# EAGLE board controller_without_autorouter (EAGLE 7.1.0)
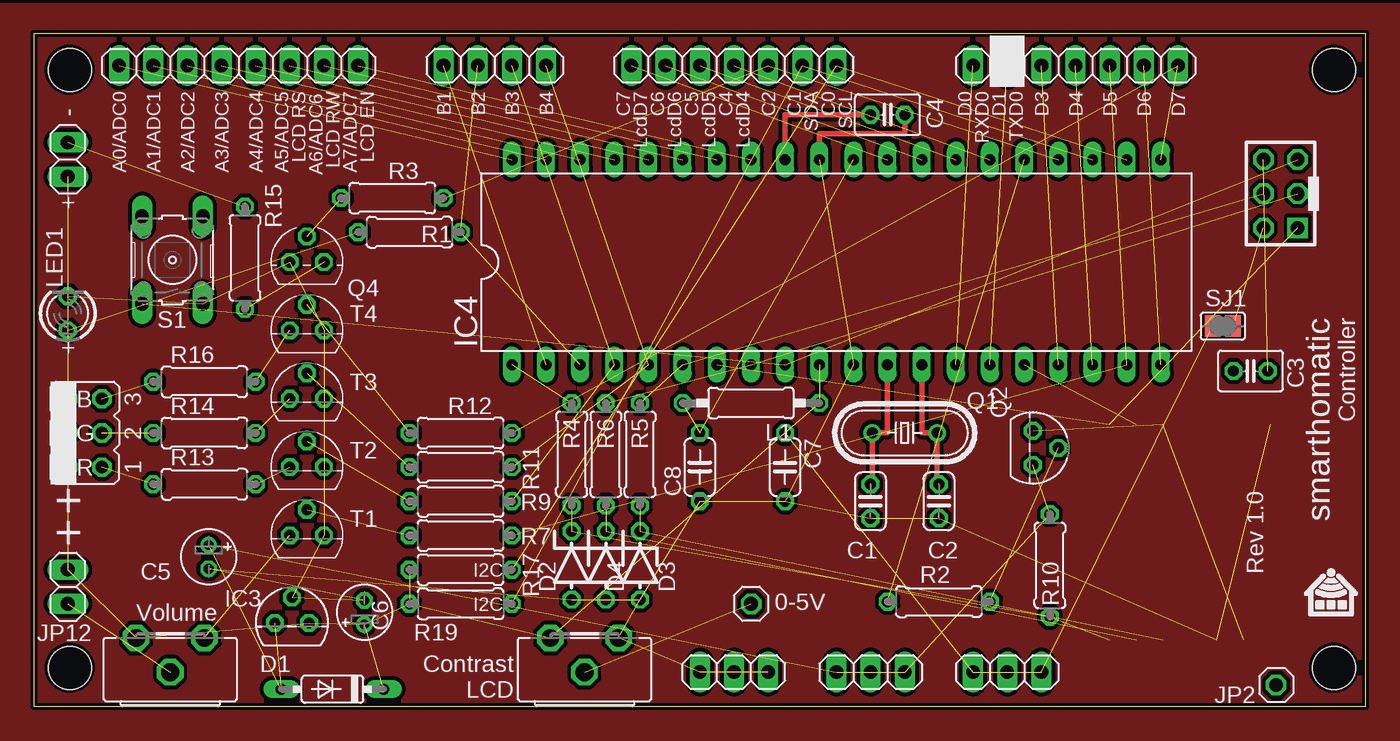
[diagram p0: board, top side]
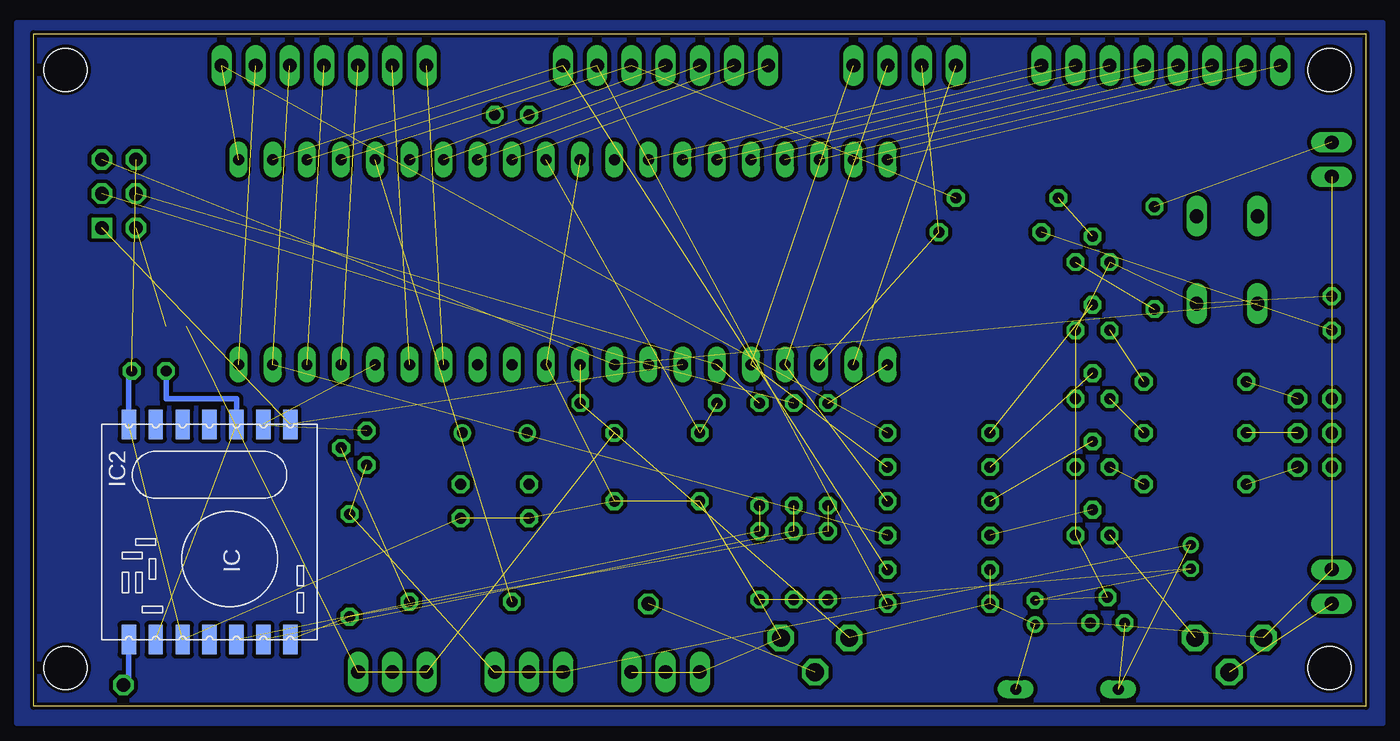
[diagram p1: board, bottom side, seen from below]

Size 99.06 x 50 mm. Coordinates in mm from the lower left corner, seen from the top.
Outline: 0,0 99.06,0 99.06,50 0,50 0,0
Copper layers (1*16): Top 0.035mm / dielectric 1.5mm / Bottom 0.035mm
Design rules "SeeedStudio_2layer_DRU_no_angle_20140221": minimum track width 6mil, minimum drill 12mil, track to track 6mil, track to pad 6mil, pad to pad 6mil, via to via 6mil, smd to smd 0mil, copper to edge 10mil, drill to drill 10mil, minimum pad ring 10mil, minimum via ring 6mil, stop-mask expansion 2mil, vias tented up to drill 100mil, thermal gap 10mil
Net classes: 0 default: clearance 0.305 mm
Holes 3.2 mm at 2.7,47.31 96.68,47.31 96.68,2.86 2.7,2.86

## Footprints (pad centres in the part's own frame; a part is rotated, then mirrored left to right if it is on the bottom)
C025-024X044 = drill 0.813 octagon: 1 -1.27,0; 2 1.27,0
C025-030X050 = drill 0.813 octagon: 1 -1.27,0; 2 1.27,0
E1,8-4 = drill 0.711 pad 1.168: + -0.889,0 | drill 0.711 pad 1.168 octagon: - 0.889,0
C050-024X044 = drill 0.813 octagon: 1 -2.54,0; 2 2.54,0
DO35-7 = drill 0.813 long: A 3.81,0; C -3.81,0
ZDIO-5 = drill 0.813 octagon: A 2.54,0; C -2.54,0
RFM = smd 2.184 x 1.067: 1 0,14; 2 0,12; 3 0,10; 4 0,8; 5 0,6; 6 0,4; 7 0,2; 8 16,2; 9 16,4; 10 16,6; 11 16,8; 12 16,10; 13 16,12; 14 16,14
TO92 = drill 0.813 octagon: 1 -1.27,0; 2 0,1.905; 3 1.27,0
DIL40 = drill 0.813 long: 1 -24.13,-7.62; 2 -21.59,-7.62; 3 -19.05,-7.62; 4 -16.51,-7.62; 5 -13.97,-7.62; 6 -11.43,-7.62; 7 -8.89,-7.62; 8 -6.35,-7.62; 9 -3.81,-7.62; 10 -1.27,-7.62; 11 1.27,-7.62; 12 3.81,-7.62; 13 6.35,-7.62; 14 8.89,-7.62; 15 11.43,-7.62; 16 13.97,-7.62; 17 16.51,-7.62; 18 19.05,-7.62; 19 21.59,-7.62; 20 24.13,-7.62; 21 24.13,7.62; 22 21.59,7.62; 23 19.05,7.62; 24 16.51,7.62; 25 13.97,7.62; 26 11.43,7.62; 27 8.89,7.62; 28 6.35,7.62; 29 3.81,7.62; 30 1.27,7.62; 31 -1.27,7.62; 32 -3.81,7.62; 33 -6.35,7.62; 34 -8.89,7.62; 35 -11.43,7.62; 36 -13.97,7.62; 37 -16.51,7.62; 38 -19.05,7.62; 39 -21.59,7.62; 40 -24.13,7.62
AVR-ISP-6 = drill 1.016 square: 1 -2.54,-1.27 | drill 1.016 octagon: 2 -2.54,1.27; 3 0,-1.27; 4 0,1.27; 5 2.54,-1.27; 6 2.54,1.27
1X01 = drill 1.016 octagon: 1 0,0
1X03 = drill 1.016 long: 1 -2.54,0; 2 0,0; 3 2.54,0
1X08 = drill 1.016 long: 1 -8.89,0; 2 -6.35,0; 3 -3.81,0; 4 -1.27,0; 5 1.27,0; 6 3.81,0; 7 6.35,0; 8 8.89,0
1X04 = drill 1.016 long: 1 -3.81,0; 2 -1.27,0; 3 1.27,0; 4 3.81,0
1X07 = drill 1.016 long: 1 -7.62,0; 2 -5.08,0; 3 -2.54,0; 4 0,0; 5 2.54,0; 6 5.08,0; 7 7.62,0
1X02 = drill 1.016 long: 1 -1.27,0; 2 1.27,0
JP3Q = drill 0.914 octagon: 1 -2.54,-1.27; 2 -2.54,1.27; 3 0,-1.27; 4 0,1.27; 5 2.54,-1.27; 6 2.54,1.27
0207/10 = drill 0.813 octagon: 1 -5.08,0; 2 5.08,0
LED3MM = drill 0.813 octagon: A -1.27,0; K 1.27,0
HC49/S = drill 0.813: 1 -2.413,0; 2 2.413,0
TO92' = drill 0.813 octagon: 1 1.27,0; 2 0,1.905; 3 -1.27,0
TO-92 = drill 0.813 octagon: 1 -1.27,0; 2 0,1.905; 3 1.27,0
0207/7 = drill 0.813 octagon: 1 -3.81,0; 2 3.81,0
CA9H = drill 1.321 octagon: A -2.54,0; E 2.54,0; S 0,2.54
B3F-10XX = drill 1.016 long: 1 -3.251,2.261; 2 3.251,2.261; 3 -3.251,-2.261; 4 3.251,-2.261
SJ = smd 1.168 x 1.6: 1 -0.762,0; 2 0.762,0

## Placement (x,y rotation side)
C1  22p  [C025-024X044]  62.23,15.24 90 top
C2  22p  [C025-024X044]  67.31,15.24 90 top
C3  1µ  [C025-030X050]  90.49,24.92 180 top
C4  220n  [C025-030X050]  63.5,43.97 180 top
C5  10µ  [E1,8-4]  13.02,11.11 270 top
C6  10µ  [E1,8-4]  24.61,6.99 90 top
C7  100n  [C050-024X044]  55.88,17.78 270 top
C8  100n  [C050-024X044]  49.53,17.78 90 top
D1  1N4148  [DO35-7]  22.23,1.27 180 top
D2  3.3V  [ZDIO-5]  40.01,10.48 270 top
D3  3.3V  [ZDIO-5]  45.09,10.48 270 top
D4  3.3V  [ZDIO-5]  42.55,10.48 270 top
IC2  RFM12  [RFM]  93.98,20.95 270 bottom
IC3  LP2950Z  [TO92]  19.21,6.19 0 top
IC4  ATMEGA644-20PU  [DIL40]  59.69,33.02 0 top
JP1  AVR-ISP-6  [AVR-ISP-6]  92.71,38.1 90 top
JP2  ANT  [1X01]  92.39,1.59 0 top
JP3  GND  [1X03]  52.07,2.54 180 top
JP4  +3V3  [1X03]  62.23,2.54 0 top
JP5  +5V  [1X03]  72.39,2.54 0 top
JP6  Port A  [1X08]  15.24,47.62 0 top
JP7  Port B  [1X04]  34.29,47.62 0 top
JP8  Port C  [1X07]  52.07,47.62 180 top
JP9  Port D  [1X07]  77.47,47.62 0 top
JP10  LCD Backlight  [1X02]  2.54,40.64 270 top
JP11  LCD Contrast  [1X01]  53.34,7.62 0 top
JP12  Speaker  [1X02]  2.54,8.89 90 top
JP13  LED  [JP3Q]  3.81,20.32 90 top
L1  10µH  [0207/10]  53.34,22.54 180 top
LED1  2mA  [LED3MM]  2.54,29.21 90 top
Q1  20MHz  [HC49/S]  64.77,20.32 180 top
Q2  BC327  [TO92']  74.3,19.21 270 top
Q4  2N7000  [TO-92]  20.32,33.02 0 top
R1  1K5  [0207/7]  27.94,35.24 180 top
R2  560R  [0207/7]  67.31,7.78 180 top
R3  47k  [0207/7]  26.67,37.78 0 top
R4  1k  [0207/7]  40.01,18.73 270 top
R5  1k  [0207/7]  45.09,18.73 270 top
R6  1k  [0207/7]  42.55,18.73 270 top
R7  4k7  [0207/7]  31.75,12.7 0 top
R8  200R  [CA9H]  10.16,5.08 180 top
R9  560R  [0207/7]  31.75,15.24 0 top
R10  1M  [0207/7]  75.56,10.48 270 top
R11  560R  [0207/7]  31.75,17.78 0 top
R12  560R  [0207/7]  31.75,20.32 0 top
R13  7R5  [0207/7]  12.7,16.51 0 top
R14  5R6  [0207/7]  12.7,20.32 0 top
R15  10R  [0207/7]  15.72,33.34 270 top
R16  3R9  [0207/7]  12.7,24.13 0 top
R17  10k  [0207/7]  31.75,10.16 0 top
R18  20k  [CA9H]  40.96,5.08 180 top
R19  10k  [0207/7]  31.75,7.62 180 top
S1  RES  [B3F-10XX]  10.32,33.18 90 top
SJ1  VCC  [SJ]  88.42,28.26 180 top
T1  BC337  [TO92']  20.32,12.7 0 top
T2  BC337  [TO92']  20.32,17.78 0 top
T3  BC337  [TO92']  20.32,22.86 0 top
T4  BC337  [TO92']  20.32,27.94 0 top

## Library data of the parts
C1-C8 L1 R1-R7 R9-R17 R19 = rcl
D1-D4 = diode
IC2 = hopeRF
IC3 = linear
IC4 = atmel; MPN: ATMEGA644-20PU; OC_FARNELL: 1288340; OC_NEWARK: 23M5060
JP1 = avr-5-4.16
JP2-JP12 = pinhead
JP13 SJ1 = jumper
LED1 = led
Q1 = crystal; OC_FARNELL: 1667008; OC_NEWARK: unknown
Q2 = transistor-pnp
Q4 = transistor-fet
R8 R18 = pot
S1 = switch-omron; MPN: B3F-1000; OC_FARNELL: 176432; OC_NEWARK: 36M3542
T1-T4 = transistor

## Nets
+3V3: C5.+ D1.A IC3.1 JP4.1 JP4.2 JP4.3 Q2.1 R10.1
+5V: C6.+ C7.1 D1.C IC3.3 IC4.10 JP5.1 JP5.2 JP5.3 JP10.2 JP12.2 JP13.2 JP13.4 JP13.6 L1.1 R8.E R17.1 R18.E R19.2 SJ1.2
GND: C1.1 C2.1 C3.1 C4.1 C5.- C6.- C7.2 C8.1 D2.A D3.A D4.A IC2.7 IC2.10 IC3.2 IC4.11 IC4.31 JP1.6 JP3.1 JP3.2 JP3.3 LED1.K Q4.1 R18.A S1.3 T1.1 T2.1 T3.1 T4.1
N$1: C1.2 IC4.12 Q1.2
N$2: C2.2 IC4.13 Q1.1
N$3: IC4.6 JP1.4 R5.1
N$4: IC2.1 IC4.7 JP1.1
N$5: D4.C IC2.13 R6.2
N$6: C4.2 IC4.32
N$7: IC4.8 JP1.3 R6.1
N$8: IC4.9 JP1.5 S1.1
N$9: IC4.2 JP7.1
N$10: IC4.40 JP6.1
N$11: IC4.39 JP6.2
N$12: LED1.A R1.2
N$13: IC4.26 JP8.4
N$14: IC4.38 JP6.3
N$15: IC2.2 IC4.16
N$16: D3.C IC2.12 R5.2
N$17: IC4.37 JP6.4
N$18: JP1.2 SJ1.1
N$19: IC4.36 JP6.5
N$20: IC4.35 JP6.6
N$21: IC4.29 JP8.7
N$22: IC4.34 JP6.7
N$23: IC4.33 JP6.8
N$24: IC4.3 JP7.2 R1.1
N$25: IC2.8 JP2.1
N$26: IC4.1 R4.1
N$27: D2.C IC2.14 R4.2 R10.2
N$28: IC4.25 R2.2
N$29: Q2.2 R2.1
N$30: IC4.4 JP7.3 R9.2
N$31: IC4.5 JP7.4 R11.2
N$32: C3.2 IC2.3 IC2.9 Q2.3
N$33: IC4.22 JP8.1 R17.2
N$34: IC4.23 JP8.2 R19.1
N$35: IC4.24 JP8.3 R3.2
N$36: IC4.19 JP9.5 R7.2
N$38: IC4.28 JP8.6
N$39: IC4.20 JP9.6
N$40: IC4.14 JP9.1
N$41: IC4.15 JP9.2
N$42: IC4.17 JP9.3
N$43: IC4.18 JP9.4
N$44: IC4.21 JP9.7 R12.2
N$45: IC4.27 JP8.5
N$46: C8.2 IC4.30 L1.2
N$47: R7.1 T1.2
N$49: R8.A T1.3
N$50: JP12.1 R8.S
N$51: Q4.2 R3.1
N$52: Q4.3 R15.2
N$53: JP10.1 R15.1
N$54: JP11.1 R18.S
N$55: R9.1 T2.2
N$56: R11.1 T3.2
N$57: R12.1 T4.2
N$61: JP13.1 R13.1
N$62: R13.2 T2.3
N$63: JP13.3 R14.1
N$64: R14.2 T3.3
N$65: JP13.5 R16.1
N$66: R16.2 T4.3

## Tracks (layer width: path | path; a pad name or v marks a point on that pad's centre or on a via)
+3V3  (7 unrouted)
+5V  (18 unrouted)
GND  (25 unrouted)
  Top 0.406: IC4.31 58.42,42.55 64.77,42.55 C4.1
  Bottom 0.406: C3.1 91.98,24.92 IC2.7
N$1
  Top 0.406: IC4.12 63.5,20.32 Q1.2 62.36,16.51 C1.2
N$2
  Top 0.406: IC4.13 66.04,20.32 Q1.1 67.18,16.51 C2.2
N$3  (2 unrouted)
N$4  (2 unrouted)
N$5  (2 unrouted)
N$6
  Top 0.406: C4.2 55.88,43.97 IC4.32
N$7  (2 unrouted)
N$8  (2 unrouted)
N$9  (1 unrouted)
N$10  (1 unrouted)
N$11  (1 unrouted)
N$12  (1 unrouted)
N$13  (1 unrouted)
N$14  (1 unrouted)
N$15  (1 unrouted)
N$16  (2 unrouted)
N$17  (1 unrouted)
N$18  (1 unrouted)
N$19  (1 unrouted)
N$20  (1 unrouted)
N$21  (1 unrouted)
N$22  (1 unrouted)
N$23  (1 unrouted)
N$24  (2 unrouted)
N$25
  Bottom 0.406: JP2.1 91.98,1.59 IC2.8
N$26  (1 unrouted)
N$27  (3 unrouted)
N$28  (1 unrouted)
N$29  (1 unrouted)
N$30  (2 unrouted)
N$31  (2 unrouted)
N$32  (2 unrouted)
  Bottom 0.406: C3.2 89.22,22.86 83.98,22.86 IC2.3
N$33  (2 unrouted)
N$34  (2 unrouted)
N$35  (2 unrouted)
N$36  (2 unrouted)
N$37
  pour Bottom: -1.27,50.8 100.33,50.8 100.33,-1.27 -1.27,-1.27
N$38  (1 unrouted)
N$39  (1 unrouted)
N$40  (1 unrouted)
N$41  (1 unrouted)
N$42  (1 unrouted)
N$43  (1 unrouted)
N$44  (2 unrouted)
N$45  (1 unrouted)
N$46  (2 unrouted)
N$47  (1 unrouted)
N$48
  pour Top: -2.54,52.07 101.6,52.07 101.6,-2.54 -2.54,-2.54
N$49  (1 unrouted)
N$50  (1 unrouted)
N$51  (1 unrouted)
N$52  (1 unrouted)
N$53  (1 unrouted)
N$54  (1 unrouted)
N$55  (1 unrouted)
N$56  (1 unrouted)
N$57  (1 unrouted)
N$61  (1 unrouted)
N$62  (1 unrouted)
N$63  (1 unrouted)
N$64  (1 unrouted)
N$65  (1 unrouted)
N$66  (1 unrouted)

## Text on the board
tNames: A0/ADC0 | A1/ADC1 | A2/ADC2 | A3/ADC3 | A4/ADC4 | A5/ADC5 | LCD RS | A6/ADC6 | LCD RW | A7/ADC7 | LCD EN | B1 | B2 | B3 | B4 | C7 | LcdD7 | C6 | LcdD6 | C5 | LcdD5 | C4 | LcdD4 | C2 | C1 | SDA | C0 | SCL | D0 | RXD0 | D1 | TXD0 | D3 | D4 | D5 | D6 | D7 | - | + | smarthomatic | Controller | + | B | G | R | + | + | I2C | Rev 1.0 | I2C | 0-5V | Volume | Contrast | LCD